# Altium PCB ATU.PcbDoc (part 2 of 2)
Units mm, origin at the board's own origin, x right, y up, seen from the top; angles counter-clockwise.
Board outline 168 x 90 mm, 2 copper layers (Top Layer, Bottom Layer), stack 1.571 mm thick; 161 components, 107 nets, 611 pads, 1151 vias.
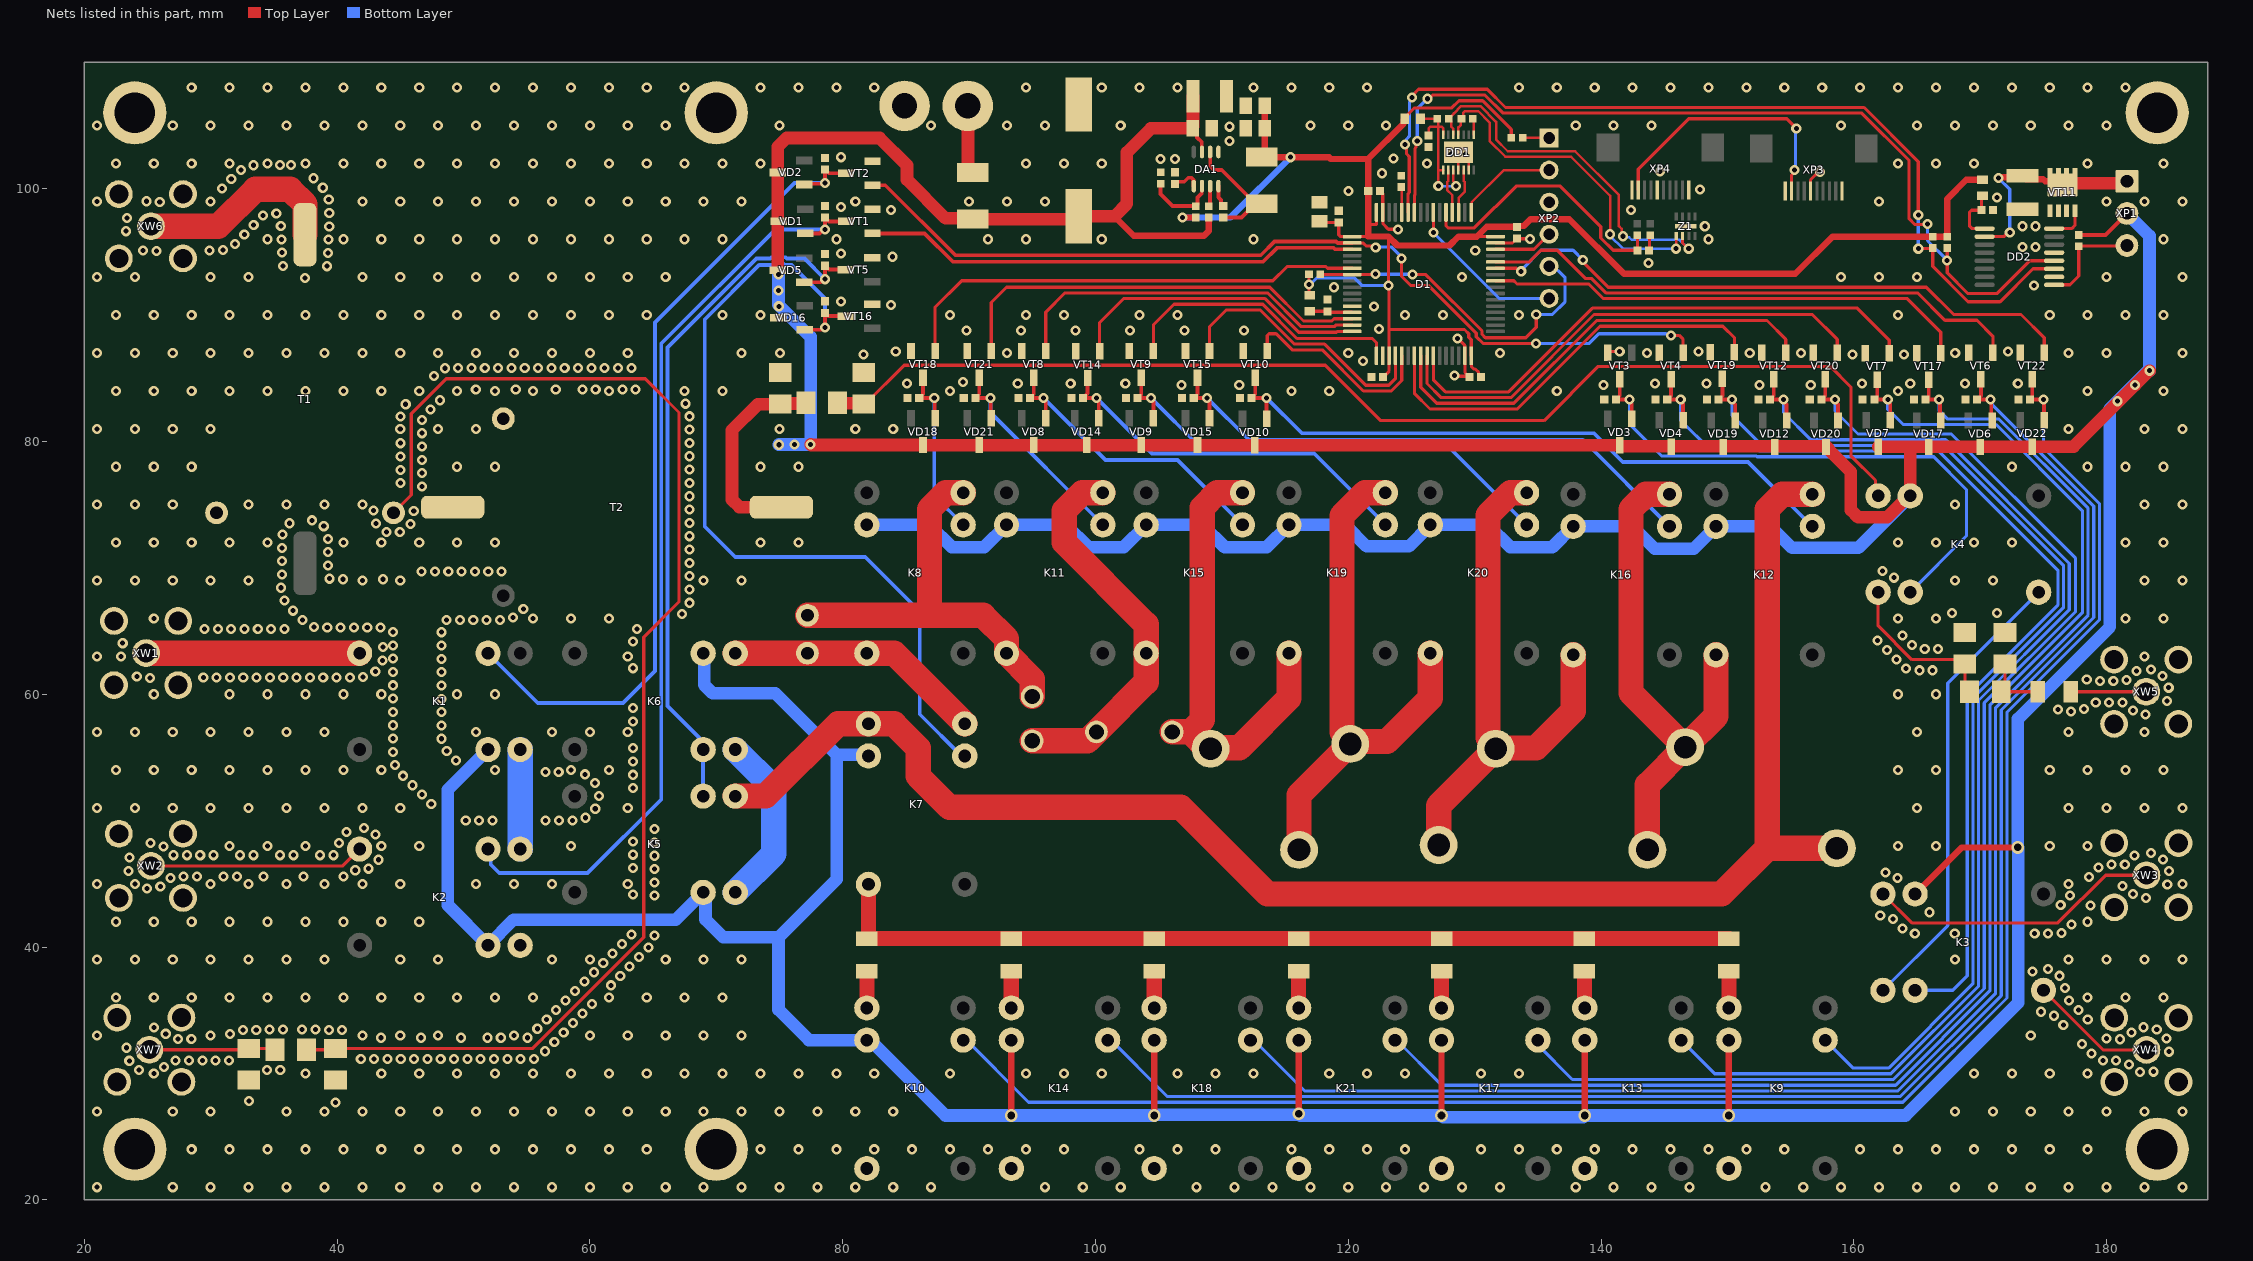
[diagram p2: the nets of this part, all layers, seen from the top]

## Via types
v1: diameter 0.8, hole 0.4, Top Layer to Bottom Layer, tented both sides, 1115 vias
v2: diameter 0.8, hole 0.4, Top Layer to Bottom Layer, 29 vias
v3: diameter 1, hole 0.6, Top Layer to Bottom Layer, tented both sides, 7 vias

## Nets (pads, with @x,y where several pads share a name; then routed paths per layer and width w, separated by ;. In a path a pad name is that pad's centre, name@x,y a point inside that pad or via, vN(x,y) a via of type N, cw(c..) or ccw(c..) an arc to the next point about the centre after c; other vN are vias at no path point) (continued)
GND: C2.1 C3.1 C4.1 C5.1 C6.2 C7.1 C9.1 C10.1 C11.1 C12.1 C13.1 C14.1 C15.1 C16.1 C17.1 C18.1 C19.1 C20.1 C21.1 C29.1 C30.1 C31.1 C32.1 C33.1 C34.1 C35.1 C36.1 C37.1 C38.1 C39.1 C40.1 C41.1 C42.1 C43.1 C44.1 C45.1 C46.1 D1.12 D1.18 D1.31 D1.47 D1.63 DA1.1 DD1.4 DD1.6 DD1.8 DD1.15 DD2.2 DD2.5 K2.7 K9.1 K10.1 K13.1 K14.1 K17.1 K18.1 K21.1 pad.1 R3.2 R5.1 R6.1 R11.2 R12.1 R14.2 R15.1 R16.1 R18.1 R19.1 T1.3 T2.1 T2.3 VT1.2 VT2.2 VT3.2 VT4.2 VT5.2 VT6.2 VT7.2 VT8.2 VT9.2 VT10.2 VT11.S VT12.2 VT14.2 VT15.2 VT16.2 VT17.2 VT18.2 VT19.2 VT20.2 VT21.2 VT22.2 XP2.3 XP3.1 XP3.6 XP3.10 XP4.1 XP4.6 XP4.10 XP5.2 XW1.2 XW2.2 XW3.2 XW4.2 XW5.2 XW6.2 XW7.2 Z1.9 | length 19.8
  Top Layer w0.2: DD1.4@128.721,101.473 DD1.15@128.721,102.868 ; v2(129.267,102.739) 129.521,102.485 DD1.6@129.521,101.473 ; R12.1@129.863,105.537 129.921,105.479 DD1.8@129.921,104.263
  Top Layer w0.25: C18.1@122.507,99.822 122.734,99.595 D1.63@122.734,98.126 122.749,98.111 122.749,97.215 123.177,96.787 123.939,96.787 v1(123.952,96.774) ; v1(128.397,85.217) 128.46,85.153 129.525,85.153 C15.1@129.588,85.09 129.234,85.444 D1.31@129.234,86.786 129.219,86.801 129.219,87.605 128.693,88.131 v1(128.648,88.131) ; D1.47@131.654,95.706 132.996,95.706 C17.1@133.35,96.06 133.374,96.036 134.342,96.036 v1(134.366,96.012) ; VT3.2@140.528,87.029 140.621,87.122 v1(141.478,87.122) ; C13.1@143.795,95.123 143.843,95.171 143.843,96.276 R11.2@143.891,96.324 ; XP3.6@156.575,99.822 156.575,100.695 157.214,101.334 v1(157.311,101.334)
  other v1: 21,21 27,21 30,21 33,21 36,21 39,21 42,21 45,21 48,21 51,21 54,21 57,21 60,21 63,21 66,21 69,21 72,21 75,21 78,21 81,21 84,21 87,21 96,21 99,21 102,21 108,21 111,21 114,21 117,21 120,21 123,21 126,21 129,21 132,21 138,21 141,21 144,21 147,21 153,21 156,21 159,21 162,21 165,21 168,21 171,21 174,21 177,21 180,21 183,21 186,21 28.5,24 31.5,24 34.5,24 37.5,24 40.5,24 43.5,24 46.5,24 49.5,24 52.5,24 55.5,24 58.5,24 61.5,24 64.5,24 73.5,24 76.5,24 79.5,24 82.5,24 85.5,24 88.5,24 91.5,24 94.5,24 97.5,24 103.5,24 106.5,24 109.5,24 115.5,24 118.5,24 121.5,24 124.5,24 130.5,24 133.5,24 136.5,24 139.5,24 142.5,24 145.5,24 148.5,24 151.5,24 154.5,24 160.5,24 163.5,24 166.5,24 169.5,24 172.5,24 175.5,24 178.5,24 21,27 27,27 30,27 36,27 39,27 42,27 45,27 48,27 51,27 54,27 57,27 60,27 63,27 66,27 69,27 72,27 75,27 78,27 81,27 84,27 168,27 171,27 174,27 177,27 180,27 183,27 186,27 39.878,27.686 33.02,27.813 25.5,30 37.5,30 43.5,30 46.5,30 49.5,30 52.5,30 55.5,30 58.5,30 61.5,30 64.5,30 67.5,30 70.5,30 73.5,30 76.5,30 79.5,30 82.5,30 88.5,30 94.5,30 97.5,30 100.5,30 106.5,30 109.5,30 112.5,30 118.5,30 121.5,30 124.5,30 130.5,30 133.5,30 169.5,30 172.5,30 175.5,30 178.5,30 182.642,30.126 183.696,30.138 24.317,30.266 34.45,30.271 35.504,30.271 26.322,30.503 181.761,30.704 23.562,31.002 179.702,31.025 180.756,31.023 27.231,31.036 28.285,31.036 29.339,31.036 30.393,31.036 31.447,31.03 41.877,31.143 42.931,31.143 43.985,31.143 45.039,31.143 46.093,31.143 47.147,31.143 48.201,31.143 49.255,31.143 50.309,31.143 51.363,31.143 52.417,31.143 53.471,31.143 54.525,31.143 55.579,31.151 178.808,31.584 184.95,31.72 56.441,31.756 23.345,32.033 178.063,32.329 57.187,32.502 27.414,32.718 28.468,32.718 181.048,32.705 184.725,32.749 179.997,32.775 43.468,32.825 46.63,32.825 49.792,32.825 51.9,32.825 52.954,32.825 55.062,32.825 21,33 30,33 42,33 45,33 48,33 54,33 60,33 63,33 66,33 69,33 72,33 174,33 31.545,33.134 26.446,33.136 181.962,33.231 57.932,33.247 32.553,33.44 33.607,33.44 39.347,33.44 40.401,33.44 34.66,33.483 35.714,33.483 37.24,33.483 38.294,33.483 183.965,33.48 55.841,33.536 25.525,33.649 182.926,33.657 176.572,33.82 58.677,33.992 178.506,34.266 56.586,34.281 175.827,34.565 59.422,34.738 174.821,34.88 177.761,35.011 57.332,35.026 60.168,35.483 58.077,35.772 177.016,35.756 22.5,36 25.5,36 28.5,36 31.5,36 34.5,36 37.5,36 40.5,36 43.5,36 46.5,36 49.5,36 52.5,36 55.5,36 61.5,36 64.5,36 67.5,36 70.5,36 178.5,36 181.5,36 184.5,36 58.822,36.517 176.702,36.763 61.658,36.974 59.567,37.262 62.404,37.719 176.273,37.725 60.313,38.008 174.149,38.054 175.359,38.25 63.149,38.464 61.058,38.753 21,39 24,39 27,39 30,39 33,39 36,39 39,39 45,39 48,39 57,39 60,39 66,39 69,39 72,39 168,39 177,39 180,39 183,39 186,39 63.894,39.209 61.803,39.498 64.64,39.955 62.549,40.243 65.103,40.901 63.294,40.989 22.5,42 25.5,42 28.5,42 31.5,42 34.5,42 37.5,42 40.5,42 43.5,42 46.5,42 178.5,42 65.103,44.063 63.421,44.143 24.968,44.643 26.014,44.777 21,45 24,45 30,45 33,45 36,45 39,45 42,45 45,45 51,45 54,45 57,45 63,45 177,45 186,45 65.103,45.117 26.81,45.468 27.857,45.584 28.911,45.584 31.019,45.584 32.073,45.584 34.181,45.584 37.343,45.584 40.505,45.59 23.505,46.031 41.44,46.076 65.103,46.171 42.487,46.197 63.421,46.251 43.268,46.906 23.59,47.081 65.103,47.225 27.064,47.266 28.118,47.266 29.172,47.266 30.226,47.266 32.334,47.266 33.388,47.266 35.496,47.266 36.55,47.266 38.658,47.266 39.712,47.266 63.421,47.305 26.258,47.946 31.5,48 34.5,48 37.5,48 43.5,48 46.5,48 58.5,48 163.5,48 166.5,48 175.5,48 178.5,48 25.244,48.234 40.142,48.229 65.103,48.279 63.421,48.359 43.05,48.901 40.736,49.099 65.103,49.333 42.136,49.426 50.182,50.027 51.236,50.027 52.29,50.027 56.506,50.027 57.56,50.027 58.614,50.027 59.648,50.229 60.426,50.94 21,51 24,51 27,51 30,51 33,51 36,51 39,51 42,51 45,51 63,51 165,51 177,51 180,51 183,51 186,51 47.451,51.312 60.71,51.955 46.705,52.058 63.421,52.575 45.96,52.803 60.414,52.967 45.215,53.548 63.421,53.629 59.625,53.667 56.481,53.859 57.535,53.859 22.5,54 25.5,54 28.5,54 31.5,54 34.5,54 37.5,54 40.5,54 43.5,54 52.5,54 58.5,54 61.5,54 163.5,54 166.5,54 175.5,54 178.5,54 181.5,54 184.5,54 44.589,54.396 63.421,54.683 49.423,54.76 44.439,55.44 48.678,55.505 63.421,55.737 44.439,56.494 48.271,56.478 21,57 24,57 27,57 30,57 33,57 36,57 39,57 51,57 57,57 60,57 63,57 165,57 177,57 183,57 48.271,57.532 44.439,57.548 63.421,57.845 183.089,58.389 44.439,58.602 48.271,58.586 177.187,58.642 182.089,58.723 176.146,58.807 178.223,58.836 63.421,58.899 179.139,59.357 180.193,59.357 181.247,59.357 184.788,59.472 48.271,59.64 44.439,59.656 25.5,60 31.5,60 34.5,60 37.5,60 40.5,60 43.5,60 49.5,60 52.5,60 163.5,60 166.5,60 184.913,60.518 44.439,60.71 48.271,60.694 179.474,61.039 180.528,61.039 181.579,61.123 178.429,61.176 25.202,61.275 29.417,61.33 30.471,61.33 31.525,61.33 32.579,61.33 33.633,61.33 34.687,61.33 35.741,61.33 36.795,61.33 37.849,61.33 38.903,61.33 39.957,61.33 41.011,61.33 42.065,61.359 24.155,61.391 184.434,61.457 48.271,61.748 44.439,61.764 43.025,61.794 182.359,61.832 165.185,61.897 166.239,61.897 183.513,61.97 164.14,62.034 63.421,62.061 43.606,62.673 163.378,62.762 44.439,62.818 48.271,62.802 21,63 22.902,62.994 63,63 183,63 162.633,63.507 165.613,63.579 166.667,63.579 43.63,63.727 48.271,63.856 44.439,63.872 164.612,63.908 23.042,64.038 63.421,64.169 161.887,64.253 163.867,64.653 44.439,64.926 48.271,64.91 29.511,65.162 30.565,65.162 31.619,65.162 32.673,65.162 33.727,65.162 34.781,65.162 35.835,65.162 63.732,65.176 39.225,65.267 40.279,65.267 41.333,65.267 42.387,65.267 43.441,65.267 38.174,65.336 37.262,65.865 48.667,65.887 49.721,65.887 50.775,65.887 51.829,65.887 52.883,65.887 25.5,66 55.5,66 58.5,66 61.5,66 163.5,66 166.5,66 181.5,66 184.5,66 53.923,66.058 67.299,66.363 167.767,66.421 171.323,66.421 36.517,66.61 54.733,66.733 67.891,67.235 35.826,67.406 67.897,68.289 35.566,68.427 21,69 24,69 27,69 30,69 33,69 42,69 45,69 69,69 72,69 168,69 171,69 183,69 186,69 40.46,69.099 43.622,69.099 39.406,69.14 163.192,69.221 67.897,69.343 35.648,69.478 46.692,69.713 47.746,69.719 48.8,69.719 49.854,69.719 50.908,69.719 51.962,69.719 53.016,69.719 162.278,69.746 39.282,70.187 67.897,70.397 35.648,70.532 39.282,71.241 67.897,71.451 35.648,71.586 22.5,72 25.5,72 28.5,72 31.5,72 34.5,72 40.5,72 43.5,72 46.5,72 49.5,72 52.5,72 73.5,72 76.5,72 163.5,72 166.5,72 169.5,72 172.5,72 181.5,72 184.5,72 39.282,72.295 67.897,72.505 35.677,72.64 44.962,72.828 43.908,72.851 38.947,73.295 45.802,73.464 43.093,73.52 36.245,73.527 67.897,73.559 38.003,73.764 46.069,74.483 42.87,74.55 67.897,74.613 21,75 24,75 27,75 33,75 36,75 39,75 42,75 168,75 183,75 186,75 67.897,75.667 46.708,76.437 45.025,76.701 67.897,76.721 46.708,77.491 45.025,77.755 67.897,77.775 22.5,78 25.5,78 28.5,78 49.5,78 52.5,78 73.5,78 76.5,78 172.5,78 178.5,78 181.5,78 184.5,78 46.708,78.545 45.025,78.809 67.897,78.829 46.708,79.599 45.025,79.863 67.897,79.883 46.708,80.653 67.897,80.937 21,81 24,81 27,81 30,81 45,81 48,81 51,81 75,81 81,81 84,81 177,81 183,81 186,81 46.708,81.707 45.025,81.971 67.897,81.991 47.384,82.516 45.431,82.943 67.554,82.988 48.129,83.261 22.5,84 25.5,84 28.5,84 31.5,84 34.5,84 37.5,84 40.5,84 43.5,84 46.5,84 49.5,84 52.5,84 55.5,84 61.5,84 67.5,84 70.5,84 88.5,84 115.5,84 118.5,84 136.5,84 163.5,84 178.5,84 184.5,84 50.976,84.122 54.138,84.122 57.3,84.122 59.408,84.122 60.462,84.122 62.57,84.122 63.624,84.122 106.807,84.455 111.379,84.455 140.208,84.455 152.527,84.455 156.591,84.455 85.09,84.582 93.853,84.582 98.044,84.582 102.362,84.582 144.272,84.582 148.336,84.582 160.655,84.582 164.465,84.582 168.783,84.582 172.974,84.582 89.535,84.709 47.667,85.179 48.525,85.792 49.579,85.804 50.633,85.804 51.687,85.804 52.741,85.804 53.795,85.804 54.849,85.804 55.903,85.804 56.957,85.804 58.011,85.804 59.065,85.804 60.119,85.804 61.173,85.804 62.227,85.804 63.281,85.804 121.158,86.36 81.661,86.868 159.893,86.868 163.957,86.868 21,87 24,87 27,87 30,87 33,87 36,87 39,87 42,87 45,87 48,87 51,87 54,87 57,87 60,87 63,87 72,87 75.057,86.995 93,87 120,87 132,87 143.637,86.995 151.765,86.995 155.829,86.995 168.021,86.995 177,87 180,87 186,87 84.201,87.122 147.701,87.122 172.212,87.122 89.789,88.773 94.107,88.773 98.425,88.773 102.743,88.773 107.061,88.773 111.76,88.773 122.428,88.9 22.5,90 25.5,90 28.5,90 31.5,90 34.5,90 37.5,90 40.5,90 43.5,90 46.5,90 49.5,90 52.5,90 55.5,90 58.5,90 61.5,90 64.5,90 70.5,90 73.5,90 88.5,90 94.5,90 97.5,90 103.5,90 106.5,90 124.5,90 127.5,90 133.5,90 163.5,90 175.5,90 178.5,90 181.5,90 184.5,90 122.047,90.678 83.82,90.805 79.883,91.059 118.872,92.202 174.244,92.329 37.457,92.942 21,93 24,93 30,93 33,93 42,93 45,93 48,93 51,93 54,93 57,93 60,93 63,93 66,93 129,93 159,93 162,93 165,93 180,93 186,93 39.203,93.865 35.723,93.884 143.764,94.107 83.947,94.615 79.883,94.869 39.282,94.916 35.648,94.935 25.703,95.063 24.651,95.114 29.918,95.112 130.048,95.123 30.972,95.152 173.355,95.377 174.371,95.377 31.91,95.632 39.336,95.969 35.59,95.988 34.5,96 40.5,96 43.5,96 46.5,96 49.5,96 52.5,96 55.5,96 58.5,96 61.5,96 64.5,96 67.5,96 70.5,96 79.5,96 91.5,96 94.5,96 100.5,96 112.5,96 148.5,96 184.5,96 32.661,96.371 23.3,96.635 39.381,97.022 148.209,97.028 173.355,97.028 174.371,97.028 35.549,97.041 33.406,97.117 23.373,97.686 34.151,97.862 35.191,98.033 39.381,98.076 83.82,98.298 142.367,98.298 79.883,98.552 25.972,98.944 21,99 24.92,99.007 30,99 42,99 45,99 48,99 51,99 54,99 57,99 60,99 63,99 66,99 69,99 72,99 81,99 90,99 93,99 96,99 162,99 180,99 183,99 186,99 39.343,99.129 171.323,99.314 120.015,99.822 147.828,99.949 30.883,100.014 38.87,100.071 31.628,100.759 38.131,100.822 122.682,101.219 144.653,101.346 32.394,101.483 33.38,101.854 35.488,101.865 36.352,101.858 126.238,101.981 22.5,102 25.5,102 28.5,102 31.5,102 34.5,102 37.5,102 40.5,102 43.5,102 46.5,102 49.5,102 52.5,102 55.5,102 58.5,102 61.5,102 64.5,102 67.5,102 70.5,102 73.5,102 94.5,102 97.5,102 100.5,102 163.5,102 166.5,102 169.5,102 178.5,102 184.5,102 105.156,102.362 106.299,102.362 123.567,102.373 79.883,102.489 110.617,103.759 110.617,104.902 21,105 27,105 30,105 33,105 36,105 39,105 42,105 45,105 48,105 51,105 54,105 57,105 60,105 63,105 66,105 75,105 87,105 93,105 96,105 102,105 117,105 120,105 123,105 138,105 141,105 144,105 159,105 165,105 168,105 171,105 174,105 177,105 180,105 28.5,108 31.5,108 34.5,108 37.5,108 40.5,108 43.5,108 46.5,108 49.5,108 52.5,108 55.5,108 58.5,108 61.5,108 64.5,108 67.5,108 73.5,108 76.5,108 79.5,108 82.5,108 94.5,108 100.5,108 103.5,108 106.5,108 112.5,108 115.5,108 118.5,108 121.5,108 133.5,108 136.5,108 139.5,108 142.5,108 145.5,108 148.5,108 151.5,108 154.5,108 157.5,108 160.5,108 163.5,108 166.5,108 169.5,108 172.5,108 175.5,108 178.5,108 181.5,108
  other v2: 164.825,41.069 167.987,41.069 174.311,41.069 175.365,41.069 176.418,41.122 163.848,41.464 177.227,41.798 163.103,42.209 162.091,42.504 165.996,42.751 178.717,43.288 176.369,43.32 183.102,43.872 177.115,44.065 182.102,44.207 181.26,44.84 184.801,44.955 163.47,45.449 178.605,45.556 162.512,45.89 184.926,46.002 179.354,46.298 180.383,46.523 181.437,46.523 184.447,46.94 182.216,47.233 183.526,47.453 128.124,102.739
I2C_SCL: D1.58 DD2.4 R20.1 | length 71.8
  Top Layer w0.25: D1.58@125.234,98.126 125.234,99.466 125.281,99.513 125.281,103.183 125.356,103.258 125.356,103.654 v1(125.462,103.759) ; v1(126.265,107.114) 126.388,107.114 126.687,107.412 130.815,107.412 132.251,105.976 160.631,105.976 164.375,102.232 164.375,97.617 164.837,97.155 165.77,97.155 v1(165.825,97.21) ; R20.1@167.386,95.308 v1(167.386,94.327) 167.386,93.345 169.037,91.694 171.323,91.694 173.927,94.297 DD2.4@175.851,94.297
  Bottom Layer w0.25: v1(125.462,103.759) 125.462,106.31 v1(126.265,107.114) ; v1(165.825,97.21) 165.825,95.888 v1(167.386,94.327)
I2C_SDA: D1.59 DD2.3 R21.1 | length 73.6
  Top Layer w0.25: v1(124.501,103.48) 124.606,103.375 124.606,102.758 124.831,102.533 124.831,99.699 124.734,99.602 D1.59@124.734,98.126 ; v1(125.055,107.228) 125.055,107.354 125.563,107.862 131.002,107.862 132.438,106.426 160.817,106.426 165.1,102.143 v1(165.1,97.917) ; v1(165.1,95.25) 165.129,95.279 166.214,95.279 R21.1@166.243,95.308 166.243,93.852 169.036,91.059 171.577,91.059 174.18,93.662 DD2.3@175.851,93.662
  Bottom Layer w0.25: v1(124.501,103.48) 124.606,103.585 124.606,103.905 124.841,104.14 124.841,106.864 125.055,107.079 v1(125.055,107.228) ; v1(165.1,95.25) v1(165.1,97.917)
NetC1_1: C1.1 DA1.2 L1.1 | length 8.9
  Top Layer w0.3: DA1.2@109.078,102.903 109.078,101.776 109.381,101.473 109.99,101.473 112.657,98.806 111.562,97.711 C1.1@110.109,97.711
NetC1_2: C1.2 DA1.8 | length 1.7
  Top Layer w0.3: DA1.8@109.728,100.203 109.728,99.314 109.939,99.103 109.939,98.801 C1.2@110.109,98.631
NetC5_2: C5.2 DA1.5 | length 2.2
  Top Layer w0.3: C5.2@106.299,100.378 106.469,100.548 107.025,100.548 107.344,100.867 107.593,100.867 107.768,100.691 107.768,100.213 DA1.5@107.778,100.203
NetC8_1: C8.1 R4.1 R5.2 | length 5.2
  Top Layer w0.25: R5.2@171.958,62.377 171.958,60.492 R4.1@171.664,60.198 C8.1@174.565,60.198
NetC8_2: C8.2 XW5.1 | length 6
  Top Layer w0.25: C8.2@177.165,60.198 XW5.1@183.134,60.198
NetC12_2: C12.2 DD1.1 DD1.3 DD1.14 L3.2 R9.2 | length 12.2
  Top Layer w0.2: L3.2@125.725,105.537 R9.2@127.058,105.537 127.116,105.479 127.116,104.902 ; C12.2@126.365,104.219 126.365,104.775 126.492,104.902 127.116,104.902 ; v1(127.124,100.203) 127.124,101.454 127.116,101.462 ; DD1.1@127.521,101.473 127.127,101.473 127.116,101.462 ; DD1.14@127.521,104.263 127.521,104.762 127.381,104.902 127.116,104.902 ; DD1.3@128.321,101.473 128.321,100.568 128.524,100.365 v1(128.524,100.203) ; 127.116,101.462 127.116,104.902
  Bottom Layer w0.2: v1(127.124,100.203) v1(128.524,100.203)
NetC13_2: C13.2 D1.53 R10.2 | length 21.5
  Top Layer w0.25: D1.53@127.734,98.126 127.734,97.056 127.889,96.901 129.984,96.901 133.286,100.203 136.779,100.203 139.984,96.998 139.984,96.099 140.961,95.123 C13.2@142.875,95.123 R10.2@142.875,96.324
NetC14_2: C14.2 D1.13 L4.1 | length 3.4
  Top Layer w0.25: L4.1@116.967,90.302 116.97,90.299 118.362,90.299 C14.2@118.364,90.297 118.44,90.221 120.299,90.221 D1.13@120.314,90.206
NetC22_1: C22.1 C23.2 C24.1 C25.2 C26.1 C27.2 C28.2 K7.1 | length 72.6
  Top Layer w1.2: K7.1@82.042,44.958 82.042,40.695 82.017,40.67 C23.2@81.915,40.67 C25.2@93.345,40.67 C27.2@104.648,40.67 115.951,40.67 127.254,40.67 C24.1@138.684,40.67 C22.1@150.114,40.67
NetC22_2: C22.2 K9.6 | length 2.6
  Top Layer w1.2: K9.6@150.114,35.179 C22.2@150.114,37.816
NetC23_1: C23.1 K10.6 | length 2.6
  Top Layer w1.2: K10.6@81.915,35.433 C23.1@81.915,38.07
NetC24_2: C24.2 K13.6 | length 2.6
  Top Layer w1.2: K13.6@138.684,35.179 C24.2@138.684,37.816
NetC25_1: C25.1 K14.6 | length 2.6
  Top Layer w1.2: K14.6@93.345,35.433 C25.1@93.345,38.07
NetC26_2: C26.2 K17.6 | length 2.6
  Top Layer w1.2: K17.6@127.381,35.179 C26.2@127.381,37.816
NetC27_1: C27.1 K18.6 | length 2.6
  Top Layer w1.2: K18.6@104.648,35.433 C27.1@104.648,38.07
NetC28_1: C28.1 K21.6 | length 2.6
  Top Layer w1.2: K21.6@116.078,35.306 C28.1@116.078,37.943
NetC35_2: C35.2 DD2.9 L12.2 | length 4.6
  Top Layer w0.25: L12.2@170.18,99.446 170.101,99.367 C35.2@170.101,98.298 169.31,98.298 169.164,98.152 169.164,97.028 169.333,96.859 170.33,96.859 DD2.9@170.351,96.837
NetC37_2: C37.2 DD2.10 VT11.D XP1.1 | length 17.3
  Top Layer w0.25: DD2.10@170.351,96.203 171.873,96.203 172.19,96.52 v1(172.339,96.52)
  Top Layer w0.5: v1(171.45,100.838) 171.507,100.895 173.23,100.895 C37.2@173.355,101.02 173.63,100.745 174.972,100.745 175.133,100.584 176.51,100.584 VT11.D@176.656,100.438
  Top Layer w1: VT11.D@176.656,100.438 181.464,100.438 XP1.1@181.61,100.584
  Bottom Layer w0.25: v1(171.45,100.838) 172.339,99.949 v1(172.339,96.52)
NetD1_7: D1.7 R13.1 XP2.5 | length 27
  Top Layer w0.25: R13.1@117.798,93.218 117.804,93.212 120.308,93.212 D1.7@120.314,93.206 120.326,93.218 v1@122.174,93.218 ; v1(125.1,93.223) 125.12,93.202 126.129,93.202 130.584,88.748 130.584,88.472 130.849,88.207 134.054,88.207 134.874,89.027 v1(134.874,90.043)
  Bottom Layer w0.25: v1(122.145,93.247) 122.159,93.233 125.09,93.233 v1(125.1,93.223) ; v1(134.874,90.043) 136.14,90.043 137.16,91.063 137.16,92.964 136.626,93.498 136.583,93.498 136.228,93.853 XP2.5@135.89,93.853
NetD1_60: D1.60 R14.1 | length 2
  Top Layer w0.2: R14.1@124.206,100.134 124.234,100.106 D1.60@124.234,98.126
NetDA1_6: DA1.6 R2.1 R3.1 | length 5.8
  Top Layer w0.3: R3.1@105.156,100.388 105.156,99.568 106.103,98.621 R2.1@107.95,98.621 108.077,98.748 108.077,99.314 108.418,99.655 108.418,100.193 DA1.6@108.428,100.203
NetDA1_7: DA1.7 R1.1 | length 1.6
  Top Layer w0.3: R1.1@108.966,98.621 109.068,98.723 109.068,100.193 DA1.7@109.078,100.203
NetDD2_1: DD2.1 R22.1 XP1.3 | length 8.4
  Top Layer w0.25: DD2.1@175.851,92.392 177.101,92.392 177.8,93.091 R22.1@177.8,95.435 177.834,95.469 181.575,95.469 XP1.3@181.61,95.504
NetDD2_8: DD2.8 VT11.G | length 2.9
  Top Layer w0.25: DD2.8@175.851,96.837 177.228,96.837 177.5,97.109 VT11.G@177.5,98.252
NetK1_1: K1.1 XW1.1 | length 16.9
  Top Layer w2: XW1.1@24.905,63.246 K1.1@41.783,63.246
NetK1_7: K1.7 K2.6 | length 7.9
  Bottom Layer w2: K2.6@54.483,47.752 K1.7@54.483,55.626
NetK2_1: K2.1 XW2.1 | length 17.1
  Top Layer w0.25: XW2.1@25.273,46.425 40.456,46.425 K2.1@41.783,47.752
NetK3_1: K3.1 XW4.1 | length 10.1
  Top Layer w0.25: K3.1@175.006,36.576 179.718,31.864 XW4.1@183.147,31.864
NetK3_6: K3.6 K4.1 | length 36.6
  Bottom Layer w0.25: K3.6@162.306,36.576 167.429,41.699 167.429,60.876 K4.1@174.625,68.072
NetK3_7: K3.7 XW3.1 | length 23.4
  Top Layer w0.25: K3.7@162.306,44.196 164.592,41.91 176.149,41.91 179.921,45.682 XW3.1@183.147,45.682
NetK4_6: K4.6 R4.2 R6.2 | length 13.1
  Top Layer w0.25: K4.6@161.925,68.072 161.925,65.405 164.592,62.738 168.422,62.738 R6.2@168.783,62.377 168.783,60.579 R4.2@169.164,60.198
NetK4_7: K4.7 R7.2 R16.2 | length 95.2
  Top Layer w0.25: R16.2@81.661,82.971 81.811,82.971 84.871,86.031 118.185,86.031 122.562,81.654 135.502,81.654 139.786,85.938 158.135,85.938 159.766,84.307 159.766,78.867 161.712,76.921 161.712,75.905 K4.7@161.925,75.692
  Top Layer w1: R7.2@79.609,83.058 79.653,83.014 81.617,83.014 R16.2@81.661,82.971
NetK5_6: K5.6 K7.6 K12.7 L7.2 | length 128.8
  Top Layer w2: K5.6@71.501,51.943 73.914,51.943 79.629,57.658 K7.6@82.042,57.658 84.074,57.658 85.979,55.753 85.979,53.524 88.449,51.054 106.753,51.054 113.611,44.196 149.542,44.196 153.162,47.816 ; K12.7@156.718,75.819 154.334,75.819 153.162,74.647 153.162,47.816 ; L7.2@158.654,47.816 153.162,47.816
NetK5_7: K5.7 K6.7 | length 13.8
  Bottom Layer w2: K5.7@71.501,44.323 74.549,47.371 74.549,52.578 K6.7@71.501,55.626
NetK6_6: K6.6 K7.7 K8.1 L5.1 | length 20.5
  Top Layer w2: K6.6@71.501,63.246 L5.1@77.216,63.246 K8.1@81.915,63.246 84.074,63.246 K7.7@89.662,57.658
NetK8_7: K8.7 K11.1 L5.2 L6.1 | length 33.6
  Top Layer w2: L5.2@77.216,66.246 86.995,66.246 ; K8.7@89.535,75.946 88.167,75.946 86.868,74.647 86.868,66.373 86.995,66.246 ; L6.1@94.996,59.817 94.996,61.214 K11.1@92.964,63.246 92.964,64.397 91.115,66.246 86.995,66.246
NetK11_7: K11.7 K15.1 L6.2 L8.1 | length 30.8
  Top Layer w2: L6.2@94.996,56.317 99.37,56.317 L8.1@100.076,57.023 104.013,60.96 104.013,65.532 97.536,72.009 97.536,74.52 98.962,75.946 K11.7@100.584,75.946
NetK12_1: K12.1 K16.7 L7.1 L9.2 | length 41.8
  Top Layer w2: L9.2@143.668,47.689 143.668,52.83 L7.1@146.654,55.816 ; K16.7@145.415,75.819 143.539,75.819 142.367,74.647 142.367,60.103 L7.1@146.654,55.816 ; K12.1@149.098,63.119 149.098,58.26 L7.1@146.654,55.816
NetK15_7: K15.7 K19.1 L8.2 L10.1 | length 36.8
  Top Layer w2: L8.2@106.076,57.023 107.504,57.023 ; K15.7@111.633,75.946 109.63,75.946 108.458,74.774 108.458,57.977 107.504,57.023 ; K19.1@115.316,63.246 115.316,59.69 111.394,55.768 109.188,55.768 L10.1@109.109,55.689 108.838,55.689 107.504,57.023
NetK16_1: K16.1 K20.7 L9.1 L11.2 | length 43.8
  Top Layer w2: L11.2@127.158,48.07 127.158,51.179 L9.1@131.668,55.689 ; K20.7@134.112,75.946 132.84,75.946 131.064,74.17 131.064,56.564 131.668,55.96 L9.1@131.668,55.689 ; K16.1@137.795,63.119 137.795,58.674 134.874,55.753 131.732,55.753 L9.1@131.668,55.689
NetK19_7: K19.7 K20.1 L10.2 L11.1 | length 44
  Top Layer w2: L10.2@116.109,47.689 116.109,52.021 L11.1@120.158,56.07 ; K19.7@122.936,75.946 121.33,75.946 119.507,74.123 119.507,56.992 120.158,56.341 L11.1@120.158,56.07 ; K20.1@126.492,63.246 126.492,59.69 123.063,56.261 120.349,56.261 L11.1@120.158,56.07
NetL2_1: L2.1 XP5.1 | length 5.3
  Top Layer w1: XP5.1@89.662,106.299 89.916,106.045 89.916,101.541 90.166,101.291 L2.1@90.297,101.291
NetR7_1: R7.1 R15.2 T2.2 | length 16.4
  Top Layer w1: T2.2@75.15,74.803 71.833,74.803 71.247,75.389 71.247,80.899 73.292,82.944 75.05,82.944 75.111,83.004 77.055,83.004 R7.1@77.109,83.058
NetR8_2: R8.2 XP2.1 | length 2.1
  Top Layer w0.2: R8.2@133.8,104.013 XP2.1@135.89,104.013
NetR17_1: R17.1 R18.2 T1.4 | length 104.9
  Top Layer w0.25: R17.1@37.572,31.877 39.771,31.877 R18.2@39.878,31.984 55.479,31.984 64.262,40.767 64.262,64.516 67.056,67.31 67.056,82.296 64.389,84.963 48.641,84.963 45.866,82.188 45.866,75.76 T1.4@44.465,74.359
NetR17_2: R17.2 R19.2 XW7.1 | length 10
  Top Layer w0.25: XW7.1@25.146,31.877 32.913,31.877 R19.2@33.02,31.984 34.965,31.984 R17.2@35.072,31.877
NetT1_2: T1.2 XW6.1 | length 16.3
  Top Layer w2: XW6.1@25.273,97.028 30.607,97.028 33.528,99.949 36.293,99.949 37.465,98.777 T1.2@37.465,96.359
PWR_EN: XP3.9 XP4.9 | length 21.2
  Top Layer w0.25: XP4.9@142.944,99.901 142.944,101.542 146.928,105.526 154.697,105.526 v1(155.448,104.775) ; XP3.9@155.075,99.822 155.075,101.078 155.321,101.324 v1(155.321,101.473)
  Bottom Layer w0.25: v1(155.321,101.473) 155.385,101.536 155.385,104.712 v1(155.448,104.775)
RELAY_BYP0: C29.2 K5.5 K6.8 VD5.1 VT5.3 | length 57.3
  Top Layer w0.3: VD5.1@76.962,92.588 78.229,92.588 78.478,92.837 v1(78.613,92.837) C29.2@78.613,93.901 78.915,93.599 VT5.3@80.23,93.599
  Bottom Layer w0.3: K5.5@68.961,51.943 K6.8@68.961,55.626 68.636,55.951 68.636,56.586 66.151,59.071 66.151,87.432 73.187,94.468 74.271,94.468 74.371,94.568 75.489,94.568 75.589,94.468 76.982,94.468 v1(78.613,92.837)
RELAY_C0: C46.2 K10.8 VD22.1 VT22.3 | length 144.7
  Top Layer w0.3: VT22.3@174.117,84.929 174.117,83.487 C46.2@173.942,83.312 v1(175.006,83.312) 175.037,83.281 175.037,81.726 VD22.1@175.067,81.695
  Bottom Layer w0.25: K10.8@89.535,32.893 94.706,27.722 163.867,27.722 172.118,35.973 172.118,58.57 179.433,65.886 179.433,75.075 175.006,79.502 v1(175.006,83.312)
RELAY_C1: C43.2 K9.8 VD19.1 VT19.3 | length 88.4
  Top Layer w0.3: VT19.3@149.606,84.963 149.606,83.614 C43.2@149.304,83.312 v1(150.368,83.312) 150.368,83.177 150.617,82.928 VD19.1@150.617,81.661
  Bottom Layer w0.25: v1(150.368,83.312) 150.368,82.042 152.724,79.686 167.074,79.686 176.599,70.161 176.599,66.87 169.418,59.689 169.418,37.091 162.749,30.422 159.951,30.422 K9.8@157.734,32.639
RELAY_C2: C30.2 K14.8 VD6.1 VT6.3 | length 134
  Top Layer w0.3: VT6.3@170.053,84.929 170.053,83.614 C30.2@169.751,83.312 v1(170.815,83.312) 170.876,83.251 170.876,81.722 VD6.1@170.937,81.661
  Bottom Layer w0.25: K14.8@100.965,32.893 105.686,28.172 163.681,28.172 171.668,36.159 171.668,58.757 178.983,66.072 178.983,74.888 170.92,82.951 170.92,83.207 v1(170.815,83.312)
RELAY_C3: C36.2 K13.8 VD12.1 VT12.3 | length 97.1
  Top Layer w0.3: VT12.3@153.67,84.929 153.67,83.614 C36.2@153.368,83.312 v1(154.432,83.312) 154.432,83.177 154.681,82.928 VD12.1@154.681,81.661
  Bottom Layer w0.25: K13.8@146.334,32.639 149.001,29.972 162.935,29.972 169.868,36.905 169.868,59.502 177.049,66.683 177.049,70.347 167.26,80.136 156.592,80.136 154.432,82.296 v1(154.432,83.312)
RELAY_C4: C41.2 K18.8 VD17.1 VT17.3 | length 125.6
  Top Layer w0.3: VT17.3@165.928,84.895 165.928,83.553 C41.2@165.687,83.312 v1(166.751,83.312) 166.814,83.248 166.814,81.724 VD17.1@166.878,81.661
  Bottom Layer w0.25: K18.8@112.268,32.893 116.539,28.622 163.495,28.622 171.218,36.345 171.218,58.943 178.533,66.258 178.533,74.422 178.533,74.702 171.447,81.788 171.167,81.788 167.386,81.788 166.751,82.423 v1(166.751,83.312)
RELAY_C5: C44.2 K17.8 VD20.1 VT20.3 | length 106.2
  Top Layer w0.3: VT20.3@157.734,84.929 157.734,83.614 C44.2@157.432,83.312 v1(158.496,83.312) 158.496,83.177 158.75,82.923 VD20.1@158.75,81.661
  Bottom Layer w0.25: K17.8@135.001,32.639 135.001,32.258 137.737,29.522 163.122,29.522 170.318,36.718 170.318,59.316 177.546,66.544 177.546,70.75 167.71,80.586 160.333,80.586 158.509,82.41 158.509,83.299 v1(158.496,83.312)
RELAY_C6: C31.2 K21.8 VD7.1 VT7.3 | length 116.6
  Top Layer w0.3: VT7.3@161.859,84.895 161.859,83.548 C31.2@161.623,83.312 v1(162.687,83.312) 162.687,83.177 162.875,82.989 VD7.1@162.875,81.695
  Bottom Layer w0.25: K21.8@123.698,32.766 127.392,29.072 163.308,29.072 170.768,36.532 170.768,59.129 178.083,66.445 178.083,74.515 171.261,81.338 163.899,81.338 162.687,82.55 v1(162.687,83.312)
RELAY_CSEL: C40.2 K7.8 VD16.1 VT16.3 | length 68.6
  Top Layer w0.3: VD16.1@76.996,88.839 78.29,88.839 78.478,89.027 v1(78.613,89.027) C40.2@78.613,90.17 78.867,89.916 VT16.3@80.23,89.916
  Bottom Layer w0.3: v1(78.613,89.027) 78.613,91.313 75.958,93.968 75.382,93.968 75.282,94.068 74.578,94.068 74.478,93.968 73.394,93.968 69.088,89.662 69.088,73.279 71.501,70.866 81.788,70.866 86.106,66.548 86.106,58.42 89.408,55.118 K7.8@89.662,55.118
RELAY_EXTA: C11.2 K4.5 VD3.1 VT3.3 | length 45.1
  Top Layer w0.3: VT3.3@141.478,84.929 141.478,83.614 C11.2@141.176,83.312 v1(142.24,83.312) 142.24,83.177 142.428,82.989 VD3.1@142.428,81.788
  Bottom Layer w0.25: v1(142.24,83.312) 142.24,81.407 144.798,78.849 152.288,78.849 152.351,78.786 166.324,78.786 168.91,76.2 168.91,72.517 K4.5@164.465,68.072
RELAY_L1: C42.2 K8.8 VD18.1 VT18.3 | length 15.6
  Top Layer w0.3: VT18.3@86.36,85.056 86.36,83.741 C42.2@86.058,83.439 v1(87.249,83.439) 87.28,83.408 87.28,81.853 VD18.1@87.31,81.822
  Bottom Layer w0.3: v1(87.249,83.439) 87.249,75.692 K8.8@89.535,73.406
RELAY_L2: C45.2 K11.8 VD21.1 VT21.3 | length 18.3
  Top Layer w0.3: VT21.3@90.805,85.056 90.805,83.741 C45.2@90.503,83.439 v1(91.694,83.439) 91.725,83.408 91.725,81.853 VD21.1@91.755,81.822
  Bottom Layer w0.3: v1(91.694,83.439) 91.694,82.296 K11.8@100.584,73.406
RELAY_L3: C32.2 K15.8 VD8.1 VT8.3 | length 24.4
  Top Layer w0.3: VT8.3@95.123,85.056 95.123,83.741 C32.2@94.821,83.439 v1(95.885,83.439) 95.885,83.304 96.073,83.116 VD8.1@96.073,81.822
  Bottom Layer w0.3: v1(95.885,83.439) 100.787,78.537 106.502,78.537 K15.8@111.633,73.406
RELAY_L4: C38.2 K19.8 VD14.1 VT14.3 | length 31.5
  Top Layer w0.3: VT14.3@99.38,85.022 99.38,83.807 C38.2@99.012,83.439 v1(100.076,83.439) 100.076,83.304 100.264,83.116 VD14.1@100.264,81.822
  Bottom Layer w0.3: v1(100.076,83.439) 104.478,79.037 117.305,79.037 K19.8@122.936,73.406
RELAY_L5: C33.2 K20.8 VD9.1 VT9.3 | length 38.4
  Top Layer w0.3: VT9.3@103.632,85.056 103.632,83.741 C33.2@103.33,83.439 v1(104.394,83.439) 104.394,83.304 104.582,83.116 VD9.1@104.582,81.822
  Bottom Layer w0.3: v1(104.394,83.439) 108.296,79.537 127.981,79.537 K20.8@134.112,73.406
RELAY_L6: C39.2 K16.8 VD15.1 VT15.3 | length 45.3
  Top Layer w0.3: VT15.3@108.077,85.056 108.077,83.741 C39.2@107.775,83.439 v1(108.839,83.439) 108.839,83.304 109.027,83.116 VD15.1@109.027,81.822
  Bottom Layer w0.3: v1(108.839,83.439) 112.145,80.133 138.561,80.133 K16.8@145.415,73.279
RELAY_L7: C34.2 K12.8 VD10.1 VT10.3 | length 52
  Top Layer w0.3: VT10.3@112.649,85.056 112.649,83.741 C34.2@112.347,83.439 v1(113.538,83.439) VD10.1@113.538,81.788
  Bottom Layer w0.3: v1(113.538,83.439) 116.332,80.645 139.446,80.645 141.717,78.374 151.623,78.374 K12.8@156.718,73.279
RELAY_RXEN: C9.2 K2.5 VD1.1 VT1.3 | length 74.7
  Top Layer w0.3: VD1.1@77.03,96.459 78.163,96.459 78.478,96.774 v1(78.613,96.774) C9.2@78.613,97.711 78.915,97.409 VT1.3@80.264,97.409
  Bottom Layer w0.3: K2.5@51.943,47.752 52.16,47.535 52.16,46.519 52.832,45.847 59.817,45.847 65.651,51.681 65.651,87.749 74.676,96.774 v1(78.613,96.774)
RELAY_TXEN: C10.2 K1.5 VD2.1 VT2.3 | length 66
  Top Layer w0.3: VD2.1@76.962,100.33 77.025,100.393 78.549,100.393 v1(78.613,100.457) C10.2@78.613,101.521 78.915,101.219 VT2.3@80.264,101.219
  Bottom Layer w0.3: K1.5@51.943,63.246 55.88,59.309 62.611,59.309 65.151,61.849 65.151,89.408 76.2,100.457 v1(78.613,100.457)
RELAY_TXEN2: C21.2 K3.5 VD4.1 VT4.3 | length 80.6
  Top Layer w0.3: VT4.3@145.542,84.929 145.542,83.614 C21.2@145.24,83.312 v1(146.304,83.312) 146.304,83.177 146.492,82.989 VD4.1@146.492,81.695
  Bottom Layer w0.25: v1(146.304,83.312) 146.304,81.661 148.666,79.299 152.475,79.299 152.538,79.236 166.731,79.236 176.149,69.818 176.149,67.056 168.968,59.875 168.968,37.719 167.825,36.576 K3.5@164.846,36.576
RS422_RX: D1.52 DD1.2 | length 3.6
  Top Layer w0.2: DD1.2@127.921,101.473 127.921,100.619 127.824,100.522 127.824,99.887 128.234,99.477 D1.52@128.234,98.126
RS422_TX: D1.51 DD1.5 | length 3.6
  Top Layer w0.2: D1.51@128.734,98.126 128.734,99.27 129.224,99.76 129.224,100.517 129.121,100.62 DD1.5@129.121,101.473
RS422A: DD1.12 R9.1 Z1.6 | length 29.3
  Top Layer w0.2: DD1.12@128.321,104.263 128.321,104.737 128.15,104.909 128.15,105.345 R9.1@127.958,105.537 128.363,105.942 128.363,105.961 128.939,106.537 130.453,106.537 131.699,105.291 131.699,103.886 132.622,102.963 137.956,102.963 141.416,99.503 141.416,97.036 141.621,96.831 141.621,96.351 v1(141.736,96.236) ; Z1.6@146.447,96.266 146.447,95.716 146.913,95.25 v1(146.939,95.25)
  Bottom Layer w0.2: v1(141.736,96.236) 141.827,96.145 142.234,96.145 142.429,95.95 146.213,95.95 146.913,95.25 v1(146.939,95.25)
RS422B: DD1.11 R12.2 Z1.5 | length 27
  Top Layer w0.2: DD1.11@128.721,104.263 128.721,104.845 128.905,105.029 128.905,105.479 129.104,105.678 129.104,106.02 129.222,106.137 130.287,106.137 131.191,105.233 131.191,103.759 132.427,102.523 137.634,102.523 140.716,99.441 v1(140.716,96.393) ; v1(145.923,95.25) 145.935,95.262 145.935,96.254 Z1.5@145.947,96.266
  Bottom Layer w0.2: v1(140.716,96.393) 140.716,96.266 141.732,95.25 v1(145.923,95.25)
RX_EN: D1.3 VT1.1 | length 39.4
  Top Layer w0.3: VT1.1@82.364,96.459 86.476,96.459 88.709,94.226 113.281,94.226 114.373,95.318 118.844,95.318 118.956,95.206 D1.3@120.314,95.206
SEL_C0: D1.43 VT22.1 | length 48.4
  Top Layer w0.25: D1.43@131.654,93.706 133.293,93.706 133.536,93.464 v1(133.685,93.464) ; v1(138.557,94.361) 138.557,94.212 140.567,92.202 165.735,92.202 167.894,90.043 173.228,90.043 175.067,88.204 VT22.1@175.067,87.029
  Bottom Layer w0.25: v1@133.731,93.472 133.731,93.599 135.255,95.123 137.795,95.123 v1(138.557,94.361)
SEL_C1: D1.23 VT19.1 | length 33
  Top Layer w0.25: D1.23@125.234,86.786 125.234,83.809 126.471,82.573 133.371,82.573 138.81,88.011 138.811,88.011 139.917,89.117 149.643,89.117 150.556,88.204 VT19.1@150.556,87.063
SEL_C2: D1.44 VT6.1 | length 43.8
  Top Layer w0.25: D1.44@131.654,94.206 134.338,94.206 135.255,95.123 136.525,95.123 138.742,92.906 139.227,92.906 140.381,91.752 165.042,91.752 167.201,89.593 169.741,89.593 171.003,88.331 VT6.1@171.003,87.029
SEL_C3: D1.24 VT12.1 | length 36.3
  Top Layer w0.25: D1.24@125.734,86.786 125.734,84.277 126.988,83.023 133.108,83.023 139.652,89.567 153.13,89.567 154.62,88.077 VT12.1@154.62,87.029
SEL_C4: D1.41 VT17.1 | length 38.6
  Top Layer w0.25: D1.41@131.654,92.706 131.658,92.71 133.096,92.71 133.35,92.456 139.04,92.456 140.194,91.302 164.222,91.302 166.878,88.646 VT17.1@166.878,86.995
SEL_C5: D1.25 VT20.1 | length 39.7
  Top Layer w0.25: D1.25@126.234,86.786 126.234,84.586 127.347,83.473 132.877,83.473 139.447,90.043 156.718,90.043 158.684,88.077 VT20.1@158.684,87.029
SEL_C6: D1.26 VT7.1 | length 43.2
  Top Layer w0.25: D1.26@126.734,86.786 126.734,84.872 127.683,83.923 132.689,83.923 135.381,86.614 135.382,86.614 139.319,90.551 160.274,90.551 162.809,88.016 VT7.1@162.809,86.995
SEL_L1: D1.6 VT18.1 | length 37.9
  Top Layer w0.25: VT18.1@87.31,87.156 87.31,90.612 89.408,92.71 114.03,92.71 115.163,93.843 118.233,93.843 118.37,93.706 D1.6@120.314,93.706
SEL_L2: D1.14 VT21.1 | length 34.1
  Top Layer w0.25: VT21.1@91.755,87.156 91.755,90.993 92.964,92.202 113.795,92.202 116.462,89.535 118.702,89.535 118.873,89.706 D1.14@120.314,89.706
SEL_L3: D1.15 VT8.1 | length 29.1
  Top Layer w0.25: VT8.1@96.073,87.156 96.073,90.231 97.594,91.752 113.608,91.752 116.275,89.085 118.888,89.085 119.009,89.206 D1.15@120.314,89.206
SEL_L4: D1.16 VT14.1 | length 24.2
  Top Layer w0.25: VT14.1@100.33,87.122 100.33,89.408 102.224,91.302 113.422,91.302 116.089,88.635 119.074,88.635 119.145,88.706 D1.16@120.314,88.706
SEL_L5: D1.17 VT9.1 | length 22.7
  Top Layer w0.25: VT9.1@104.582,87.156 104.582,89.215 106.219,90.852 113.236,90.852 115.939,88.149 121.909,88.149 122.234,87.824 D1.17@122.234,86.786
SEL_L6: D1.20 VT15.1 | length 21.7
  Top Layer w0.25: VT15.1@109.027,87.156 109.027,89.088 110.341,90.402 113.049,90.402 115.752,87.699 118.132,87.699 121.386,84.445 123.216,84.445 123.731,84.961 D1.20@123.731,86.783
SEL_L7: D1.21 VT10.1 | length 16.1
  Top Layer w0.25: VT10.1@113.587,87.168 113.587,88.378 113.734,88.524 114.291,88.524 115.566,87.249 117.946,87.249 121.2,83.995 123.402,83.995 124.234,84.827 D1.21@124.234,86.786
SWCLK: D1.49 XP2.2 | length 8
  Top Layer w0.2: D1.49@129.734,98.126 129.774,98.166 129.774,98.936 132.311,101.473 XP2.2@135.89,101.473
SWDIO: D1.46 XP2.4 | length 4.7
  Top Layer w0.25: D1.46@131.654,95.206 134.702,95.206 135.889,96.393 XP2.4@135.89,96.393
SWO: D1.55 XP2.6 | length 12.9
  Top Layer w0.25: D1.55@126.734,98.126 126.74,98.12 126.74,96.526 v1(126.746,96.52)
  Bottom Layer w0.25: v1(126.746,96.52) 131.953,91.313 XP2.6@135.89,91.313
TX_EN: D1.2 VT2.1 VT4.1 | length 72.8
  Top Layer w0.25: D1.2@120.314,95.706 120.329,95.691 121.189,95.691 121.419,95.461 122.067,95.461 v1(122.173,95.356) ; v1(124.206,94.488) 124.206,93.091 124.968,92.329 126.366,92.329 130.134,88.561 130.134,88.286 130.663,87.757 134.862,87.757 v1(134.868,87.763) ; v1(145.542,88.392) 146.177,88.392 146.492,88.077 VT4.1@146.492,87.029
  Top Layer w0.3: VT2.1@82.364,100.269 83.373,100.269 88.916,94.726 113.074,94.726 114.166,95.818 119.051,95.818 119.163,95.706 D1.2@120.314,95.706
  Bottom Layer w0.25: v1(122.173,95.356) 122.194,95.377 123.444,95.377 124.206,94.615 v1(124.206,94.488) ; v1(134.868,87.763) 139.071,87.763 139.827,88.519 145.121,88.519 145.142,88.497 145.437,88.497 v1(145.542,88.392)
VDD_3V3: C2.2 C3.2 C15.2 C16.2 C17.2 C18.2 C19.2 C20.2 D1.1 D1.19 D1.32 D1.48 D1.64 L1.2 L3.1 L4.2 L12.1 R2.2 R8.1 R13.2 R20.2 R21.2 | length 140
  Top Layer w0.25: R13.2@116.898,93.218 v1(116.898,92.425) 116.898,91.631 L4.2@116.967,91.562 ; C20.2@117.729,97.421 117.82,97.33 C19.2@119.253,97.33 119.253,96.352 119.399,96.206 D1.1@120.314,96.206 121.587,96.206 ; 121.587,97.155 122.234,97.155 D1.64@122.234,98.126 ; C16.2@122.761,85.09 123.234,85.563 D1.19@123.234,86.786 123.219,86.801 123.219,88.856 ; 123.19,96.211 v1(123.19,92.329) 123.219,92.3 123.219,88.856 ; L3.1@124.465,105.537 124.465,105.612 125.242,106.389 128.189,106.389 128.763,106.962 130.629,106.962 132.9,104.691 R8.1@132.9,104.013 ; 130.175,96.206 D1.48@131.654,96.206 ; C15.2@130.508,85.09 130.313,85.285 130.313,85.465 130.043,85.735 129.921,85.735 129.749,85.907 129.749,86.771 D1.32@129.734,86.786 129.734,88.05 129.54,88.244 129.54,88.519 129.203,88.856 123.219,88.856
  Top Layer w0.5: v1(106.876,97.721) R2.2@107.95,97.721 ; C3.2@113.399,106.553 C2.2@113.399,104.775 113.399,102.748 L1.2@113.157,102.506 113.174,102.489 115.426,102.489 115.443,102.506 115.46,102.489 118.488,102.489 118.624,102.353 121.587,102.353 ; 121.587,96.211 123.19,96.211 123.897,95.504 128.016,95.504 128.718,96.206 130.175,96.206 130.949,96.98 C17.2@133.35,96.98 133.42,97.05 133.88,97.05 134.423,97.593 137.484,97.593 141.82,93.257 155.36,93.257 158.311,96.208 R21.2@166.243,96.208 R20.2@167.386,96.208 167.386,99.187 168.905,100.706 L12.1@170.18,100.706 ; 121.587,96.227 121.587,97.155 C18.2@121.587,99.822 121.587,102.353 ; L3.1@124.465,105.537 124.37,105.442 124.37,105.136 121.587,102.353
  Bottom Layer w0.25: v1(116.898,92.425) 116.989,92.425 117.492,92.927 120.507,92.927 121.105,92.329 v1(123.19,92.329)
  Bottom Layer w0.5: v1(106.876,97.721) 110.675,97.721 v1(115.443,102.489)
VDD_12V: C4.2 C6.1 C7.2 DA1.3 K1.8 K2.8 K3.8 K4.8 K5.8 K6.5 K7.5 K8.5 K9.5 K10.5 K11.5 K12.5 K13.5 K14.5 K15.5 K16.5 K17.5 K18.5 K19.5 K20.5 K21.5 L2.2 R1.2 R22.2 VD1.3 VD2.3 VD3.3 VD4.3 VD5.3 VD6.3 VD7.3 VD8.3 VD9.3 VD10.3 VD12.3 VD14.3 VD15.3 VD16.3 VD17.3 VD18.3 VD19.3 VD20.3 VD21.3 VD22.3 XP1.2 | length 604.1
  Top Layer w0.3: C4.2@107.696,104.775 108.046,104.425 108.046,104.044 108.418,103.672 108.418,102.913 DA1.3@108.428,102.903 ; R22.2@177.8,96.335 179.901,96.335 XP1.2@181.61,98.044
  Top Layer w0.5: v3(93.345,26.67) K14.5@93.345,32.639 ; 101.493,97.81 103.037,96.266 108.585,96.266 108.966,96.647 R1.2@108.966,97.721 ; v3(104.648,26.67) K18.5@104.648,32.639 ; v3(116.078,26.797) K21.5@116.078,32.766 ; v3(127.381,26.67) K17.5@127.381,32.639 ; v3(138.714,26.67) K13.5@138.714,32.639 ; v3(150.114,26.67) K9.5@150.114,32.639 ; K3.8@164.846,44.196 168.529,47.879 v3(172.974,47.879)
  Top Layer w1: VD5.3@74.879,93.538 74.879,97.409 74.879,101.28 74.879,103.327 75.565,104.013 82.931,104.013 85.09,101.854 85.09,100.711 88.147,97.654 L2.2@90.234,97.654 ; v1(77.47,79.756) 77.504,79.722 VD18.3@86.36,79.722 86.377,79.705 112.571,79.705 VD10.3@112.588,79.688 VD3.3@141.478,79.688 141.541,79.624 145.542,79.624 149.667,79.624 153.731,79.624 157.736,79.624 VD20.3@157.8,79.561 157.85,79.561 158,79.411 158,79.361 159.766,77.595 159.766,74.578 160.352,73.992 162.629,73.992 164.329,75.692 K4.8@164.465,75.692 164.465,79.468 164.338,79.595 ; L2.2@90.306,97.582 98.451,97.582 C6.1@98.679,97.81 101.493,97.81 102.489,98.806 102.489,102.87 104.394,104.775 C4.2@107.696,104.775 ; C4.2@107.696,104.925 107.713,104.942 C7.2@107.713,107.315 ; VD7.3@161.925,79.595 164.338,79.595 ; v1(183.388,85.598) v1(182.245,84.455) 177.385,79.595 VD22.3@174.117,79.595 164.338,79.595
  Bottom Layer w1: K1.8@51.943,55.626 48.768,52.451 48.768,43.307 K2.8@51.943,40.132 53.975,42.164 66.802,42.164 K5.8@68.961,44.323 69.152,44.132 69.152,42.177 70.563,40.767 74.93,40.767 ; K6.5@68.961,63.246 69.048,63.159 69.048,60.746 69.723,60.071 74.676,60.071 79.542,55.205 ; v1(74.93,93.218) v1(74.93,91.948) 74.93,90.805 77.47,88.265 v1(77.47,79.756) 74.964,79.756 v1(74.947,79.739) ; K10.5@81.915,32.639 77.343,32.639 74.93,35.052 74.93,40.767 ; K8.5@81.915,73.406 86.868,73.406 88.646,71.628 91.186,71.628 K11.5@92.964,73.406 97.663,73.406 99.441,71.628 102.235,71.628 K15.5@104.013,73.406 108.449,73.406 110.227,71.628 113.538,71.628 K19.5@115.316,73.406 119.761,73.406 121.461,71.706 124.792,71.706 K20.5@126.492,73.406 131.064,73.406 132.842,71.628 136.144,71.628 K16.5@137.795,73.279 142.494,73.279 144.272,71.501 147.32,71.501 K12.5@149.098,73.279 153.416,73.279 155.116,71.579 160.352,71.579 K4.8@164.465,75.692 ; K10.5@82.042,32.766 88.138,26.67 v3(93.345,26.67) v3(104.648,26.67) 104.712,26.733 116.014,26.733 v3(116.078,26.797) 116.205,26.67 v3(127.381,26.67) 127.508,26.543 138.587,26.543 v3(138.714,26.67) v3(150.114,26.67) 164.084,26.67 173.015,35.601 173.015,47.838 v3(172.974,47.879) 172.974,58.044 180.258,65.328 180.258,82.595 v1(180.848,83.185) v1@183.261,85.598 ; K7.5@82.042,55.118 81.955,55.205 79.542,55.205 ; XP1.2@181.61,98.044 183.388,96.266 v1(183.388,85.598) ; 74.93,40.767 79.542,45.379 79.542,55.205
  other v1: 76.2,79.756 74.947,90.695
pads on no net: D1.8 D1.9 D1.10 D1.11 D1.27 D1.28 D1.29 D1.30 D1.33 D1.34 D1.35 D1.36 D1.37 D1.38 D1.39 D1.40 D1.42 D1.45 D1.50 D1.54 D1.56 D1.57 D1.61 D1.62 DA1.4 DD1.7 DD1.9 DD1.10 DD1.13 DD2.6 DD2.7 DD2.11 DD2.12 DD2.13 DD2.14 DD2.15 DD2.16 K1.12 K2.12 K3.12 K4.12 K5.12 K6.12 K7.12 K8.6 K8.12 K9.7 K9.12 K10.7 K10.12 K11.6 K11.12 K12.6 K12.12 K13.7 K13.12 K14.7 K14.12 K15.6 K15.12 K16.6 K16.12 K17.7 K17.12 K18.7 K18.12 K19.6 K19.12 K20.6 K20.12 K21.7 K21.12 VD1.2 VD2.2 VD3.2 VD4.2 VD5.2 VD6.2 VD7.2 VD8.2 VD9.2 VD10.2 VD12.2 VD14.2 VD15.2 VD16.2 VD17.2 VD18.2 VD19.2 VD20.2 VD21.2 VD22.2 XP3.0 XP4.0 Z1.1 Z1.2 Z1.7 Z1.8

## Polygon pours and split planes (outlines as drawn)
GND on Top Layer "GND_L01_P000" (solid, pour order 0): 20.066,20.066 20.32,20.32 187.96,20.32 187.96,110.109 187.833,109.982 19.939,109.982
GND on Bottom Layer "GND_L02_P001" (solid, pour order 1): 20.066,20.066 20.32,20.32 187.96,20.32 187.96,110.109 187.833,109.982 19.939,109.982

## Keep-outs
Keep-Out Layer:
  lines w0.1: 30.861,75.658 30.861,81.534 44.069,81.534 44.069,75.658 30.861,75.658 ; 54.61,68.199 54.61,81.407 64.452,81.407 64.452,68.199 54.61,68.199
  lines w0.2: 20,20 20,110 188,110 188,20 20,20

## Other copper
Top Layer:
  rectangle net VDD_12V: 74.388,79.121 77.851,80.311
  rectangle net VDD_12V: 74.422,89.662 75.438,93.599
  pour cut-out: 79.121,77.851 79.121,71.12 75.311,71.12 73.406,69.215 73.406,65.532 67.31,65.532 67.31,41.91 73.406,41.91 73.406,32.766 161.544,32.766 161.544,77.851
Bottom Layer:
  pour cut-out: 79.121,77.851 79.121,71.12 75.311,71.12 73.406,69.215 73.406,65.532 67.31,65.532 67.31,41.91 73.406,41.91 73.406,32.766 161.544,32.766 161.544,77.851

## Silkscreen, mask and mechanical layers (free items; w line width, h text height)
Top Overlay:
  text "RF TX PA" at 22.352,101.346 h1.52
  text "EXT ANT" at 21.336,67.945 h1.52
  text "EXT AMP" at 180.213,65.786 h1.52
  text "RF RX IN" at 22.098,51.181 h1.52
  text "RF RX OUT" at 179.451,50.563 h1.52
  text "MB RX" at 180.594,36.83 h1.52
  text "MB SWR C" at 21.844,36.339 h1.52